# EAGLE board radical-pneu (EAGLE 7.4.0)
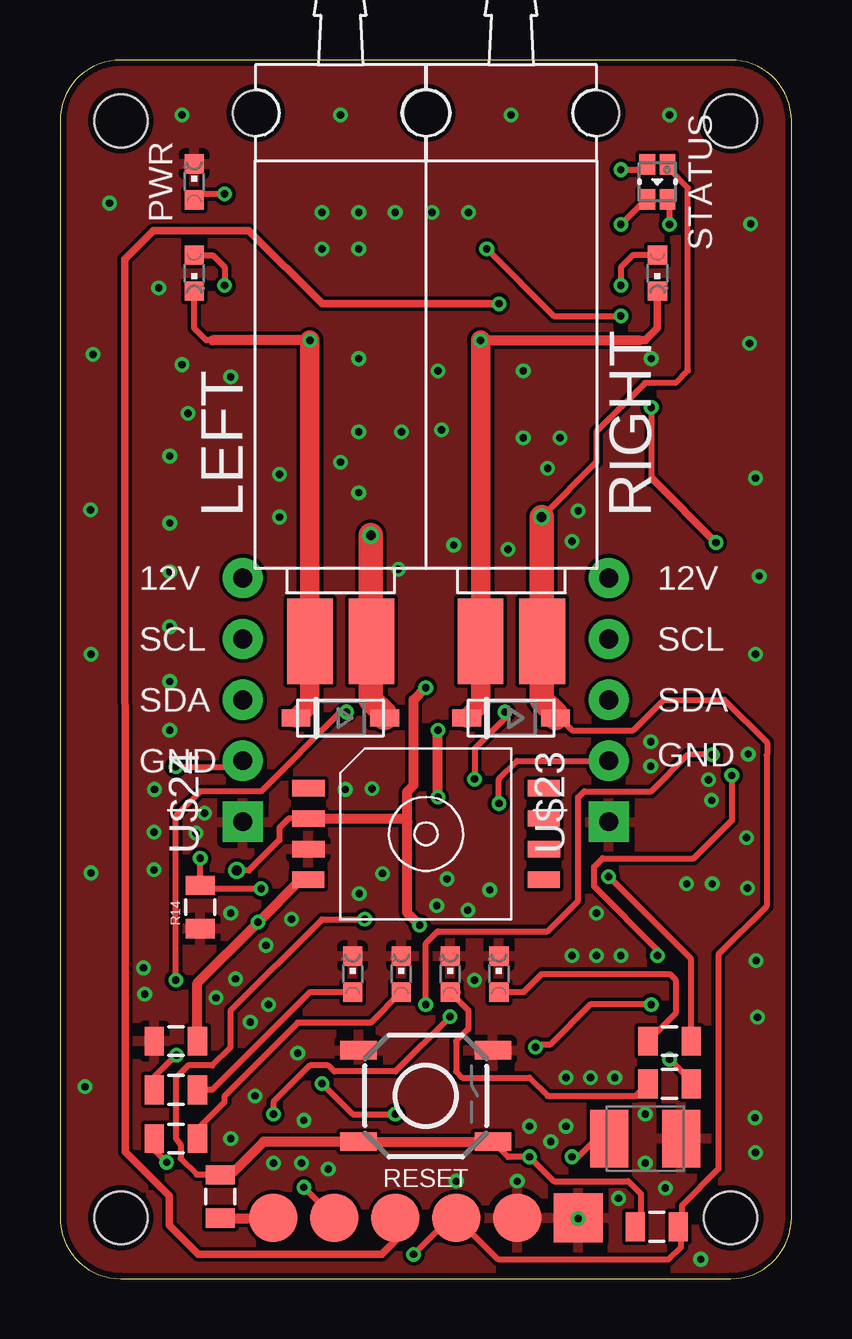
[diagram p0: board, top side]
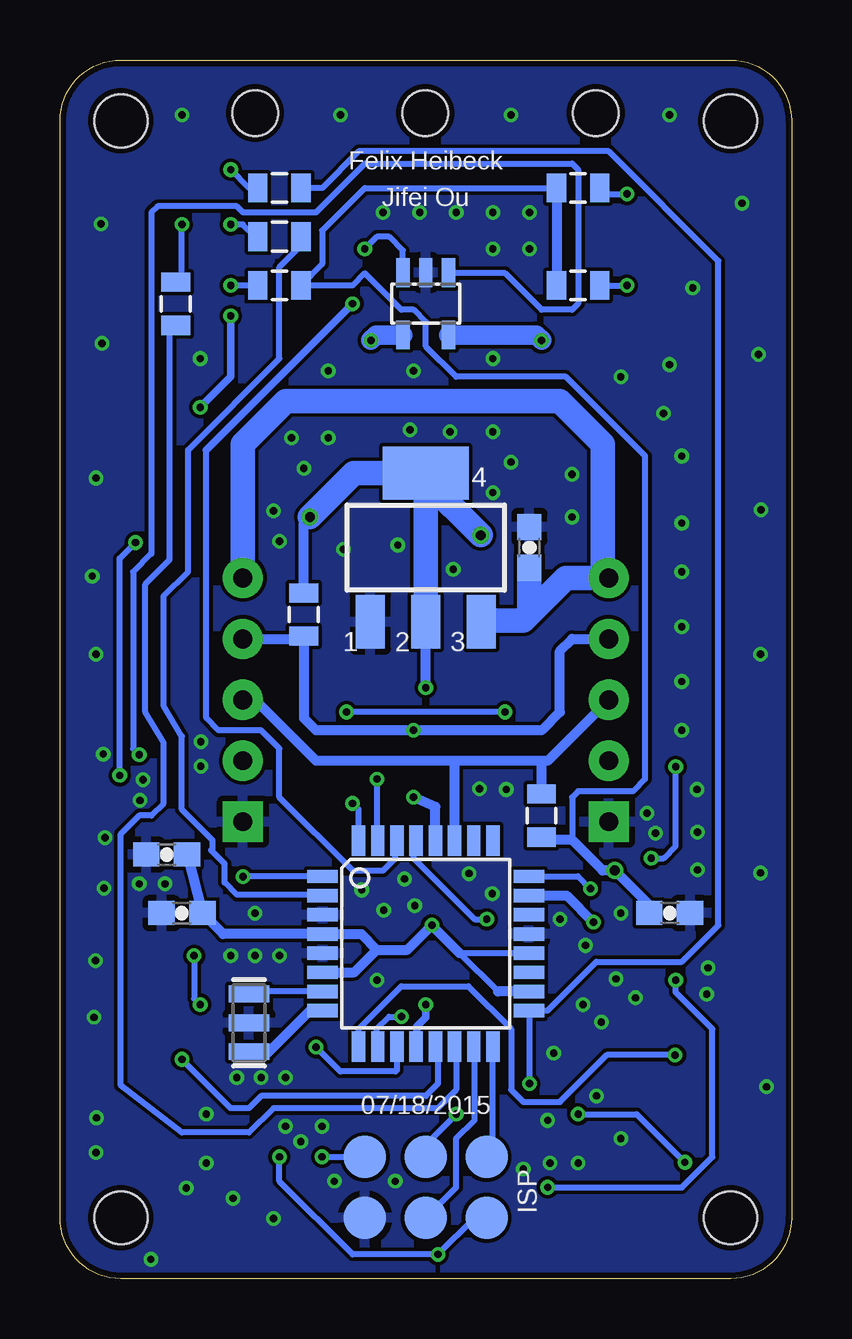
[diagram p1: board, bottom side, seen from below]

Size 30.48 x 50.8 mm. Coordinates in mm from the lower left corner, seen from the top.
Outline: 2.54,0 27.94,0 arc90 30.48,2.54 30.48,48.26 arc90 27.94,50.8 2.54,50.8 arc90 0,48.26 0,2.54 arc90 2.54,0
Copper layers (1*16): Top 0.035mm / dielectric 1.5mm / Bottom 0.035mm
Design rules "SeeedStudio_2layer_DRU_no_angle_20140221 *": minimum track width 6mil, minimum drill 12mil, track to track 6mil, track to pad 6mil, pad to pad 6mil, via to via 6mil, smd to smd 0mil, copper to edge 10mil, drill to drill 10mil, minimum pad ring 10mil, minimum via ring 6mil, stop-mask expansion 2mil, vias tented up to drill 100mil, thermal gap 10mil
Net classes: 1 vcc: width 0.254 mm
Holes 2.2 mm at 2.54,48.26 27.94,48.26 27.94,2.54 2.54,2.54

## Footprints (pad centres in the part's own frame; a part is rotated, then mirrored left to right if it is on the bottom)
CHIPLED_0603 = smd 0.8 x 0.8: A 0,-0.75; C 0,0.75
0603-CAP = smd 1.1 x 1: 1 -0.85,0; 2 0.85,0
SMC_B = smd 1.6 x 2.4: + -1.5,0; - 1.5,0
0805 = smd 0.8 x 1.2: 1 -0.9,0; 2 0.9,0
SOD-123 = smd 1.2 x 0.7: A 1.85,0; C -1.85,0
TQFP32-08 = smd 1.27 x 0.559: 1 -4.293,2.8; 2 -4.293,2; 3 -4.293,1.2; 4 -4.293,0.4; 5 -4.293,-0.4; 6 -4.293,-1.2; 7 -4.293,-2; 8 -4.293,-2.8; 17 4.293,-2.8; 18 4.293,-2; 19 4.293,-1.2; 20 4.293,-0.4; 21 4.293,0.4; 22 4.293,1.2; 23 4.293,2; 24 4.293,2.8 | smd 0.559 x 1.27: 9 -2.8,-4.293; 10 -2,-4.293; 11 -1.2,-4.293; 12 -0.4,-4.293; 13 0.4,-4.293; 14 1.2,-4.293; 15 2,-4.293; 16 2.8,-4.293; 25 2.8,4.293; 26 2,4.293; 27 1.2,4.293; 28 0.4,4.293; 29 -0.4,4.293; 30 -1.2,4.293; 31 -2,4.293; 32 -2.8,4.293
RESONATOR-SMD = smd 0.7 x 1.7: 1 -1.2,0; 2 0,0; 3 1.2,0
TACTILE-SWITCH-SMD = smd 1.524 x 0.762: 1 -2.794,1.905; 2 2.794,1.905; 3 -2.794,-1.905; 4 2.794,-1.905
LINEAR_SOT223 = smd 1.219 x 2.235: 1 -2.311,-3.099; 2 0,-3.099; 3 2.311,-3.099 | smd 3.6 x 2.2: 4 0,3.099
MPXHZ6400 = smd 1.346 x 0.686: 1 -4.892,1.908; 2 -4.892,0.64; 3 -4.892,-0.632; 4 -4.897,-1.902; 5 4.915,-1.902; 6 4.923,-0.63; 7 4.92,0.643; 8 4.92,1.908
SOT23-5L = smd 0.55 x 1.2: 1 -0.95,-1.3; 2 0,-1.3; 3 0.95,-1.3; 4 0.95,1.3; 5 -0.95,1.3
POGO_ISP = smd 1.778 x 1.778: 1 -1.27,2.54; 2 1.27,2.54; 3 -1.27,0; 4 1.27,0; 5 -1.27,-2.54; 6 1.27,-2.54
S070C-2 = smd 1.905 x 3.556: 1-1 -4.826,-24.232; 1-2 -2.261,-24.232; 2-1 2.286,-24.232; 2-2 4.851,-24.232 | hole 1.9: -7.087,-2.21; 7.112,-2.21; 0.025,-2.21
FTDI_POGO = smd 2.032 x 2.032: 1 -6.35,0; 2 -3.81,0; 3 -1.27,0; 4 1.27,0; 5 3.81,0; 6 6.35,0
LTST = smd 0.65 x 0.85: + 0.425,0.725; B -0.425,0.725; G 0.425,-0.725; R -0.425,-0.725
1X05_TIGHT = drill 0.787 pad 1.676: P$1 5.08,0; P$2 0,0; P$3 2.54,0; P$4 -2.54,0 | drill 0.787 pad 1.676 square: P$5 -5.08,0

## Placement (x,y rotation side)
1  [CHIPLED_0603]  18.29,12.7 0 top
2  [CHIPLED_0603]  24.89,41.91 180 top
3  [CHIPLED_0603]  5.59,41.91 180 top
5  [CHIPLED_0603]  16.26,12.7 0 top
7  [CHIPLED_0603]  12.19,12.7 0 top
8  [CHIPLED_0603]  14.22,12.7 0 top
C1  0.1uF  [0603-CAP]  10.92,30.48 90 bottom
C2  0.1uF  [0603-CAP]  5.08,15.24 0 bottom
C3  22uF  [SMC_B]  24.38,5.84 0 top
C5  0.1uF  [0805]  6.68,3.43 270 top
C7  470pF  [0805]  4.83,9.91 0 top
C8  0.1uF  [0603-CAP]  25.4,15.24 180 bottom
C10  0.1uF  [0603-CAP]  26.04,17.68 180 bottom
D1  [SOD-123]  18.8,23.37 180 top
D2  [SOD-123]  11.68,23.37 180 top
IC3  ATMEGA328  [TQFP32-08]  15.24,13.97 0 bottom
PWR  [CHIPLED_0603]  5.59,45.72 0 top
Q1  16Mhz  [RESONATOR-SMD]  22.61,10.67 90 bottom
R1  1k  [0805]  25.4,9.91 0 top
R2  1k  [0805]  21.34,41.4 0 bottom
R3  10K  [0805]  24.87,2.16 180 top
R4  1k  [0805]  4.83,5.84 180 top
R5  4.7k  [0805]  10.41,19.3 90 bottom
R6  4.7k  [0805]  20.32,27.69 90 bottom
R7  1k  [0805]  4.83,7.87 180 top
R8  1k  [0805]  8.89,41.4 180 bottom
R9  1k  [0805]  21.34,43.43 0 bottom
R10  1k  [0805]  25.4,8.13 0 top
R11  1k  [0805]  8.89,45.47 180 bottom
R12  1k  [0805]  25.65,40.64 270 bottom
R13  1k  [0805]  21.34,45.47 0 bottom
R14  10k  [0805]  5.84,15.49 90 top
S1  TAC_SWITCHSMD  [TACTILE-SWITCH-SMD]  15.24,7.62 0 top
U2  NCP1117-5  [LINEAR_SOT223]  15.24,30.48 0 bottom
U$1  MPXHZ6400  [MPXHZ6400]  15.24,18.54 0 top
U$3  QS5K2  [SOT23-5L]  15.24,40.64 180 bottom
U$10  ISP_POGO  [POGO_ISP]  15.24,3.81 270 bottom
U$11  S070V-2VALVE  [S070C-2]  15.24,50.8 0 top
U$12  FTDI_POGO  [FTDI_POGO]  15.24,2.54 0 top
U$21  LTST-C19FD1WT  [LTST]  24.89,45.72 0 top
U$23  1X05  [1X05_TIGHT]  22.86,24.13 90 top
U$24  1X05  [1X05_TIGHT]  7.62,24.13 90 top

## Library data of the parts
1-3 5 7 8 D1 D2 PWR = adafruit
C1 C2 C5 C8 C10 = SparkFun-Capacitors
C3 = rcl
C7 = SparkFun-Passives
IC3 Q1 = SparkFun
R1-R14 = SparkFun-Resistors
S1 = SparkFun-Electromechanical; PROD_ID: SWCH-08247
U2 = SmartPrj
U$1 U$10-U$12 U$21 U$23 U$24 = digikey
U$3 = qs5k2

## Nets
+5V: C2.1 C3.+ C8.1 C10.1 D1.C D2.C IC3.4 IC3.6 IC3.18 IC3.20 R2.2 R3.1 R5.1 R6.2 R8.2 R11.2 U2.2 U2.4 U$1.2 U$10.2 U$11.1-2 U$11.2-2 U$12.4 U$21.+
A0/PRESSURE: C7.2 IC3.23 U$1.4
D2/OUT: IC3.32 U$23.P$4
D3: IC3.1 R1.2
D4: IC3.2 R9.2
D5: IC3.9 R7.2
D6: IC3.10 R4.2
D7: IC3.11 U$3.3
D8: IC3.12 U$3.1
D9: IC3.13 R10.2
D10: IC3.14 R12.2
DTR: C5.2 U$12.1
GND: 1.C 5.C 7.C 8.C C1.2 C2.2 C3.- C7.1 C8.2 C10.2 IC3.3 IC3.5 IC3.21 PWR.C Q1.2 R14.1 S1.1 S1.2 U2.1 U$1.3 U$3.2 U$10.6 U$12.5 U$12.6 U$23.P$5 U$24.P$5
IN_PORT: IC3.24 R14.2 U$24.P$4
M1_VGND: 2.C D1.A U$3.4 U$11.2-1
M2_VGND: 3.C D2.A U$3.5 U$11.1-1
MISO: IC3.16 U$10.1
MOSI: IC3.15 U$10.4
N$1: 8.A R4.1
N$3: 7.A R7.1
N$4: IC3.8 Q1.1
N$5: 1.A R1.1
N$6: 2.A R2.1
N$7: 3.A R8.1
N$8: IC3.7 Q1.3
N$9: 5.A R10.1
N$10: PWR.A R11.1
N$11: R9.1 U$21.R
N$12: R12.1 U$21.G
N$13: R13.1 U$21.B
RESET: C5.1 IC3.29 R3.2 S1.3 S1.4 U$10.5
RX: IC3.30 U$12.3
SCK: IC3.17 R13.2 U$10.3
SCL: IC3.28 R6.1 U$23.P$3 U$24.P$3
SDA: IC3.27 R5.2 U$23.P$2 U$24.P$2
TX: IC3.31 U$12.2
VIN: C1.1 U2.3 U$23.P$1 U$24.P$1

## Tracks (layer width: path | path; a pad name or v marks a point on that pad's centre or on a via)
+5V  (via drill 0.3, 0.41)
  Top 0.254: v14.73,1.02 16.26,2.54 U$12.4 18.24,0.81 25.38,0.81 25.88,1.32 25.88,2.15 R3.1 25.91,2.17 25.91,3.05 27.43,4.57 27.43,13.51 29.44,15.52 29.44,21.82 29.46,21.84 29.46,22.35 27.69,24.13 25.15,24.13 23.88,22.86 21.34,22.86 21.08,23.11 D1.C | v21.34,5.08 21.59,5.08 22.86,6.35 C3.+ | U$21.+ 25.4,46.23 26.16,45.47 26.16,37.85 25.65,37.34 24.38,37.34 22.35,35.31 22.35,34.04 v20.07,31.75 | U$1.2 9.53,19.18 9.14,18.8 9.14,18.29 7.87,17.02 v7.37,17.02
  Top 0.406: v14.99,14.73 14.48,15.24 14.48,19.05 | 14.48,19.05 14.48,20.32 14.73,20.57 14.73,24.13 v15.24,24.64 | 14.48,19.05 14.35,19.18 U$1.2 10.23,19.3
  Top 1.016: D2.C 13.53,23.55 12.95,24.13 12.95,26.54 U$11.1-2 12.95,26.59 v12.95,30.99 | D1.C 20.65,23.55 20.07,24.13 20.07,26.54 U$11.2-2 20.07,26.59 v20.07,31.75
  Bottom 0.254: IC3.20 13.82,13.57 12.22,11.97 | U$10.2 13.21,2.54 v14.73,1.02 18.29,1.02 21.34,4.06 v21.34,5.08 | R11.2 17.78,45.47 19.56,43.69 19.56,42.28 R2.2 18.29,41.4 17.78,41.91 16.26,40.39 15.75,40.39 15.24,39.88 15.24,38.86 13.97,37.59 9.4,37.59 6.1,34.29 6.1,20.83 6.6,20.32 8.89,20.32 9.14,20.07 9.14,18.29
  Bottom 0.406: R6.2 20.32,31.5 v20.07,31.75 | C10.1 C8.1 23.68,14.37 IC3.4 17.93,14.37 17.27,13.72 | R11.2 R8.2 | IC3.6 18.22,12.77 17.27,13.72 | 13.82,13.57 v14.99,14.73 16,13.72 17.27,13.72 | IC3.18 12.22,11.97 | v15.24,24.64 U2.2 | C2.1 5.93,15.58 v7.37,17.02 7.87,17.02 9.14,18.29 10.3,18.29 R5.1
  Bottom 1.016: U2.2 U2.4 | U2.4 15.24,33.27 v12.95,30.99 | U2.4 18.24,33.58 v20.07,31.75
A0/PRESSURE  (via drill 0.3)
  Top 0.406: U$1.4 10.04,16.64 v8.25,14.86 5.73,12.33 C7.2
  Bottom 0.406: IC3.23 9.37,15.97 v8.25,14.86
D2/OUT  (via drill 0.3)
  Top 0.254: v18.29,19.81 18.29,20.83 19.05,21.59 U$23.P$4
  Bottom 0.254: IC3.32 18.04,19.56 v18.29,19.81
D3  (via drill 0.3)
  Top 0.254: v22.86,16.76 26.3,13.32 R1.2
  Bottom 0.254: v22.86,16.76 19.56,16.76 IC3.1
D4
  Bottom 0.254: R9.2 20.57,43.43 20.57,42.93 21.34,42.16 21.34,38.35 25.15,34.54 25.15,29.46 26.16,28.45 26.16,23.88 25.4,22.61 25.4,19.56 24.13,18.29 24.13,17.91 24.18,17.86 23.62,17.3 23.62,16.51 23.11,16 19.56,16 IC3.2
D5  (via drill 0.3)
  Top 0.254: R7.2 3.81,7.99 3.81,8.28 v4.85,9.32
  Bottom 0.254: IC3.9 18.03,9.91 18.03,10.41 16.26,12.19 13.46,12.19 11.68,10.41 11.68,7.87 11.18,7.37 9.65,7.37 7.7,9.32 v4.85,9.32
D6  (via drill 0.3)
  Top 0.254: v16.26,10.92 13.97,8.64 11.43,8.64 11.18,8.89 10.41,8.89 8.89,7.37 v8.89,6.86 | R4.2 3.93,5.37 v4.45,4.85
  Bottom 0.254: v16.26,10.92 16.76,10.92 17.27,10.41 17.27,9.91 IC3.10 | v8.89,6.86 6.45,6.86 v4.45,4.85
D7  (via drill 0.3)
  Top 0.254: v17.78,42.93 20.57,40.13 v23.37,40.13 | v24.64,36.32 24.64,33.33 | 24.64,33.33 24.64,33.27 | v19.81,9.65 19.81,9.75 20.42,9.75 22.1,11.43 v24.64,11.43 | 24.69,33.33 24.64,33.33 | v24.89,13.46 24.89,13.72 22.25,16.36 22.25,17.17 22.61,17.53 26.42,17.53 27.99,19.1 v27.99,20.98
  Top 0.305: 24.69,33.33 v27.33,30.68
  Bottom 0.254: IC3.11 16.44,8.71 16.51,8.64 18.8,8.64 v19.81,9.65 | U$3.3 16.19,42.86 16.76,43.43 17.27,43.43 v17.78,42.93 | v24.89,13.46 24.89,11.68 v24.64,11.43 | v27.99,20.98 27.99,30.02 v27.33,30.68
  Bottom 0.305: v23.37,40.13 23.37,37.59 v24.64,36.32
D8  (via drill 0.3)
  Top 0.254: v15.24,11.43 15.24,13.97 15.75,14.48 20.32,14.48 21.59,15.75 21.59,20.07 21.84,20.32 24.64,20.32 26.16,21.84 v27.18,21.84
  Bottom 0.254: U$3.1 14.22,41.91 11.94,41.91 10.41,40.39 9.14,40.39 8.89,40.64 8.89,46.23 9.14,46.48 17.78,46.48 19.81,44.45 22.86,44.45 23.11,44.7 26.42,44.7 26.67,44.45 26.67,30.23 27.43,29.46 27.43,22.1 v27.18,21.84 | 15.75,9.91 IC3.12
  Bottom 0.305: 15.75,9.91 15.65,9.91 15.62,9.88 15.62,10.52 15.24,10.9 v15.24,11.43
D9  (via drill 0.3)
  Top 0.254: R10.2 26.3,8.5 26.05,8.5 v25.4,9.14
  Bottom 0.254: IC3.13 14.73,9.65 14.73,8.13 15.24,7.62 22.1,7.62 22.61,7.11 23.37,7.11 v25.4,9.14
D10
  Bottom 0.254: IC3.14 13.97,9.65 13.97,7.87 14.73,7.11 21.59,7.11 22.61,6.1 25.4,6.1 27.94,8.05 27.94,18.54 27.18,19.3 26.67,19.3 26.16,19.81 26.16,22.35 26.92,23.62 26.92,28.96 25.91,29.97 25.91,39.49 R12.2
DTR
  Top 0.406: C5.2 8.88,2.53 U$12.1
GND  (via drill 0.3)
  Bottom 0.254: U$10.6 18.54,2.54
  other vias: 17.02,44.45 15.49,44.45 13.97,44.45 12.45,44.45 10.92,44.45 10.92,42.93 12.45,42.93 5.08,48.51 11.68,48.51 18.8,48.51 6.02,19.41 7.11,15.24 19.56,6.35 21.08,6.35 25.22,3.78 21.34,13.46 22.35,13.46 29.01,13.26 12.47,16.05 8.69,11.43 9.65,14.99 22.35,15.24 15.7,15.54 20.32,33.78 24.64,38.35 11.68,34.04 4.57,31.5 25.4,48.51 19.3,37.85 7.32,12.5 9.91,9.4 10.16,6.6 7.11,5.84 23.11,8.38 19.05,4.06 8.89,4.83 17.27,12.45 16.99,15.37 20.83,35.05 12.45,32.77 5.08,38.1 28.96,6.71 24.38,6.86 16.51,4.06 22.1,8.38 21.08,8.38 9.14,33.53 9.14,31.75 5.33,36.07 7.11,37.59 15.75,37.85 12.45,38.35 4.57,34.29 4.57,29.46 13,20.42 24.38,4.83 21.59,32 21.34,30.73 11.18,4.57 19.3,35.05 12.45,35.31 3.91,18.62 14.22,35.31 4.57,27.18 4.57,24.89 4.57,22.86 26.7,0.81 23.27,3.35 8.13,7.62 23.37,13.46 28.98,5.26 29.13,29.29 28.98,26.04 24.61,21.36 27.03,20.8 27.15,19.94 28.73,38.99 2.06,44.83 1.3,26.04 1.04,8 3.91,17.04 5.66,18.57 3.94,20.4 15.9,35.38 4.11,41.3 1.37,38.53 28.98,33.38 28.78,43.97 1.27,32.05 1.3,16.92 10.06,4.83 20.45,5.71 16.13,16.66 17.91,16.21 13.44,16.89 11.89,20.4 18.67,30.4 16.41,30.58 14.1,29.57 29.06,10.9 8.59,13.89 6.5,11.71 7.92,10.69 3.48,12.95 3.53,11.86 26.11,16.46 28.6,18.39 28.65,16.28 27.18,16.46 21.59,2.51 24.61,22.38 28.68,21.87
  pour Bottom: 0.25,55.12 30.73,55.37 30.73,-2.79 0.25,-3.05
  pour Top: -1.02,54.36 30.73,54.36 30.73,-2.29 -1.02,-2.29
IN_PORT  (via drill 0.3)
  Top 0.254: v8.38,16.26 5.98,16.26 R14.2 v5.84,17.53 | v4.83,21.34 7.37,21.34 U$24.P$4
  Bottom 0.254: IC3.24 8.9,16.77 v8.38,16.26 | v5.84,17.53 5.33,17.53 4.83,18.03 v4.83,21.34
M1_VGND  (via drill 0.3)
  Top 0.305: 24.38,39.12 24.89,39.62 2.C
  Top 0.356: 24.12,39.12 24.38,39.12
  Top 0.406: v17.53,39.12 24.12,39.12
  Top 0.813: v17.53,39.12 U$11.2-1 17.53,23.95 D1.A
  Bottom 0.813: U$3.4 17.3,39.34 v17.53,39.12
M2_VGND  (via drill 0.3)
  Top 0.254: 6.36,39.12 6.1,39.12 5.59,39.62 3.C
  Top 0.406: v10.41,39.12 6.36,39.12
  Top 0.813: v10.41,39.12 U$11.1-1 10.41,23.95 D2.A
  Bottom 0.813: U$3.5 10.64,39.34 v10.41,39.12
MISO
  Bottom 0.254: U$10.1 12.45,5.33 12.45,9.65 IC3.16
MOSI
  Bottom 0.254: U$10.4 13.97,3.81 13.97,5.84 13.21,6.6 13.21,9.65 IC3.15
N$1
  Top 0.254: R4.1 5.84,5.96 5.84,6.35 6.86,7.37 6.86,7.62 9.91,10.67 12.94,10.67 8.A
N$3
  Top 0.254: R7.1 6.35,7.87 10.41,11.94 12.18,11.94 7.A
N$4
  Bottom 0.254: 21.84,9.4 22.54,9.4 Q1.1
  Bottom 0.406: IC3.8 20.07,11.17 21.84,9.4
N$5
  Top 0.254: 1.A 19.32,11.95 20.07,12.7 25.4,12.7 25.65,12.45 25.65,11.06 R1.1 24.64,10.04
N$6  (via drill 0.3)
  Top 0.254: 2.A 23.86,42.66 23.37,42.16 v23.37,41.4
  Bottom 0.254: R2.1 v23.37,41.4
N$7  (via drill 0.3)
  Top 0.254: 3.A 6.36,42.66 6.86,42.16 v6.86,41.4
  Bottom 0.254: R8.1 v6.86,41.4
N$8
  Bottom 0.254: IC3.7 22.5,11.97 Q1.3
N$9
  Top 0.254: 16.51,11.94 16.51,11.68 17.02,11.18 17.02,10.41 16.51,9.91 16.51,8.64 16.76,8.38 19.56,8.38 20.32,7.62 23.99,7.62 R10.1
  Top 0.406: 5.A 16.51,11.94
N$10  (via drill 0.3)
  Top 0.254: v6.86,45.21 5.59,45.21 PWR.A
  Bottom 0.254: v6.86,45.21 7.62,45.21 7.87,45.47 R11.1
N$11  (via drill 0.3)
  Top 0.254: v23.37,43.94 24.38,44.96 U$21.R
  Bottom 0.254: v23.37,43.94 22.86,43.94 22.35,43.43 R9.1
N$12  (via drill 0.3)
  Top 0.254: v25.4,43.94 25.4,44.96 U$21.G
  Bottom 0.254: v25.4,43.94 25.4,41.91 25.65,41.66 R12.1
N$13  (via drill 0.3)
  Top 0.254: v23.37,46.23 24.38,46.23 U$21.B
  Bottom 0.254: v23.37,46.23 22.61,45.47 R13.1
RESET  (via drill 0.3)
  Top 0.254: v12.7,14.99 10.92,14.99 7.11,11.18 7.11,9.65 6.35,8.89 5.33,8.89 4.83,8.38 4.83,5.84 5.03,5.59 5.03,5 5.69,4.34 6.67,4.34 C5.1 | S1.4 18.67,5.08 v19.56,5.08 20.57,4.06 23.67,4.06 24.21,3.53 24.21,2.4 R3.2
  Top 0.406: S1.4 S1.3 8.48,5.71 7.21,4.45 6.8,4.45 C5.1
  Bottom 0.254: IC3.29 15.75,18.03 15.75,17.53 13.21,14.99 v12.7,14.99 | v19.56,5.08 U$10.5
RX  (via drill 0.3)
  Top 0.305: v18.29,40.64 10.92,40.64 7.87,43.69 3.89,43.69 2.69,42.49 2.72,5.38 2.72,5.28 4.55,3.45 4.55,2.23 5.77,1.02 13.41,1.02 13.97,1.57 U$12.3
  Bottom 0.254: IC3.30 16.51,18.03 16.51,17.53 17.02,17.02 18.29,17.02 21.34,20.07 21.34,22.1 22.1,22.86 23.88,22.86 24.38,23.37 24.38,34.54
  Bottom 0.305: v18.29,40.64 24.38,34.54
SCK  (via drill 0.3)
  Top 0.254: v13.97,6.86 12.19,6.86 v10.92,8.13
  Bottom 0.254: R13.2 19.56,45.47 18.03,46.99 7.62,46.99 3.05,42.42 3.05,14.73 4.57,13.21 8.13,13.21 10.16,11.18 10.92,11.18 IC3.17 10.92,10.92 v10.92,8.13 | U$10.3 15.24,5.59 v13.97,6.86
SCL  (via drill 0.3)
  Top 0.406: v15.75,20.07 v15.75,22.86
  Bottom 0.406: IC3.28 14.84,19.67 v15.75,20.07 | U$24.P$3 9.14,26.67 9.65,26.16 9.65,23.62 10.41,22.86 v15.75,22.86 19.81,22.86 20.32,23.37 R6.1 20.44,26.67 U$23.P$3
SDA
  Bottom 0.406: 10.41,21.59 10.16,21.59 U$24.P$2 | 10.41,21.59 13.97,21.59 | 13.97,21.59 19.81,21.59 22.35,24.13 U$23.P$2 | IC3.27 14.04,21.52 13.97,21.59 | R5.2 10.41,21.59
TX  (via drill 0.3)
  Top 0.254: v17.27,20.83 17.27,22.1 18.54,23.37 v18.54,23.62 | v4.83,12.45 4.83,19.3 5.84,20.32 8.38,20.32 11.68,23.62 v11.94,23.62 | U$12.2 v10.16,3.81
  Bottom 0.254: v17.27,20.83 17.27,18.29 IC3.31 | v11.94,23.62 v18.54,23.62 | v4.83,12.45 4.83,11.94 3.3,10.41 3.3,5.08 4.57,3.81 v10.16,3.81
VIN
  Bottom 0.406: U2.3 12.95,27.38 12.95,27.18
  Bottom 1.016: 7.87,29.21 9.4,29.21 10.8,27.81 | 10.8,27.81 11.18,27.43 12.88,27.43 U2.3 | C1.1 10.92,27.94 10.8,27.81 | 7.87,29.21 7.87,34.8 9.65,36.58 21.08,36.58 22.86,34.8 U$23.P$1 | 7.87,29.21 U$24.P$1

## Text on the board
tPlace: STATUS | LEFT | RIGHT
tNames: 12V | 12V | SCL | SCL | SDA | SDA | GND | GND | RESET
bNames: Felix Heibeck | Jifei Ou | 07/18/2015